# EAGLE board Sensor_Board_0x04_Luminosity_TSL2561_v1 (EAGLE 8.4.1)
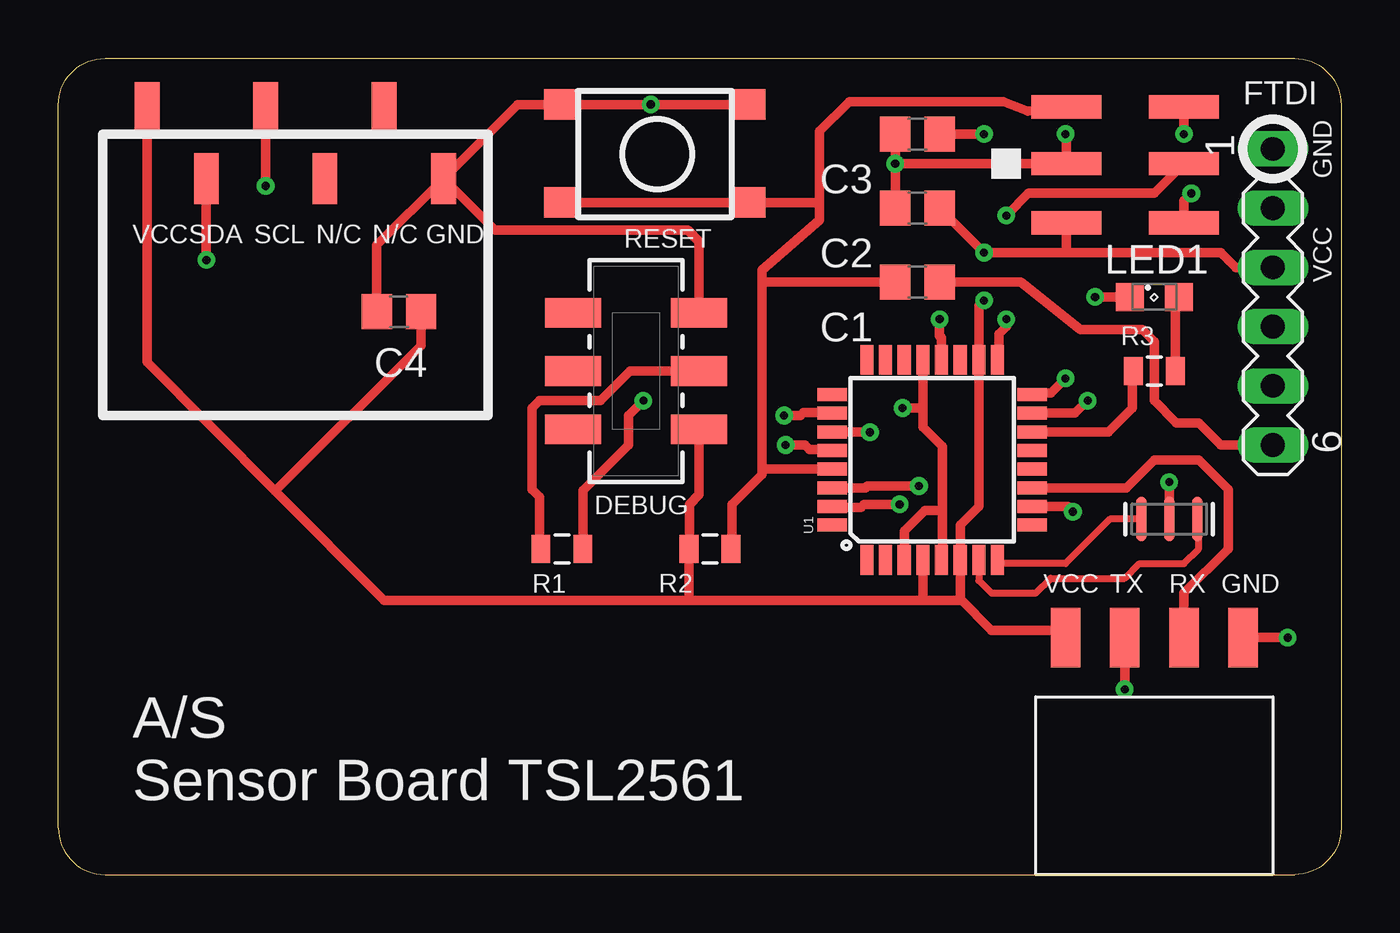
[diagram p0: board, top side]
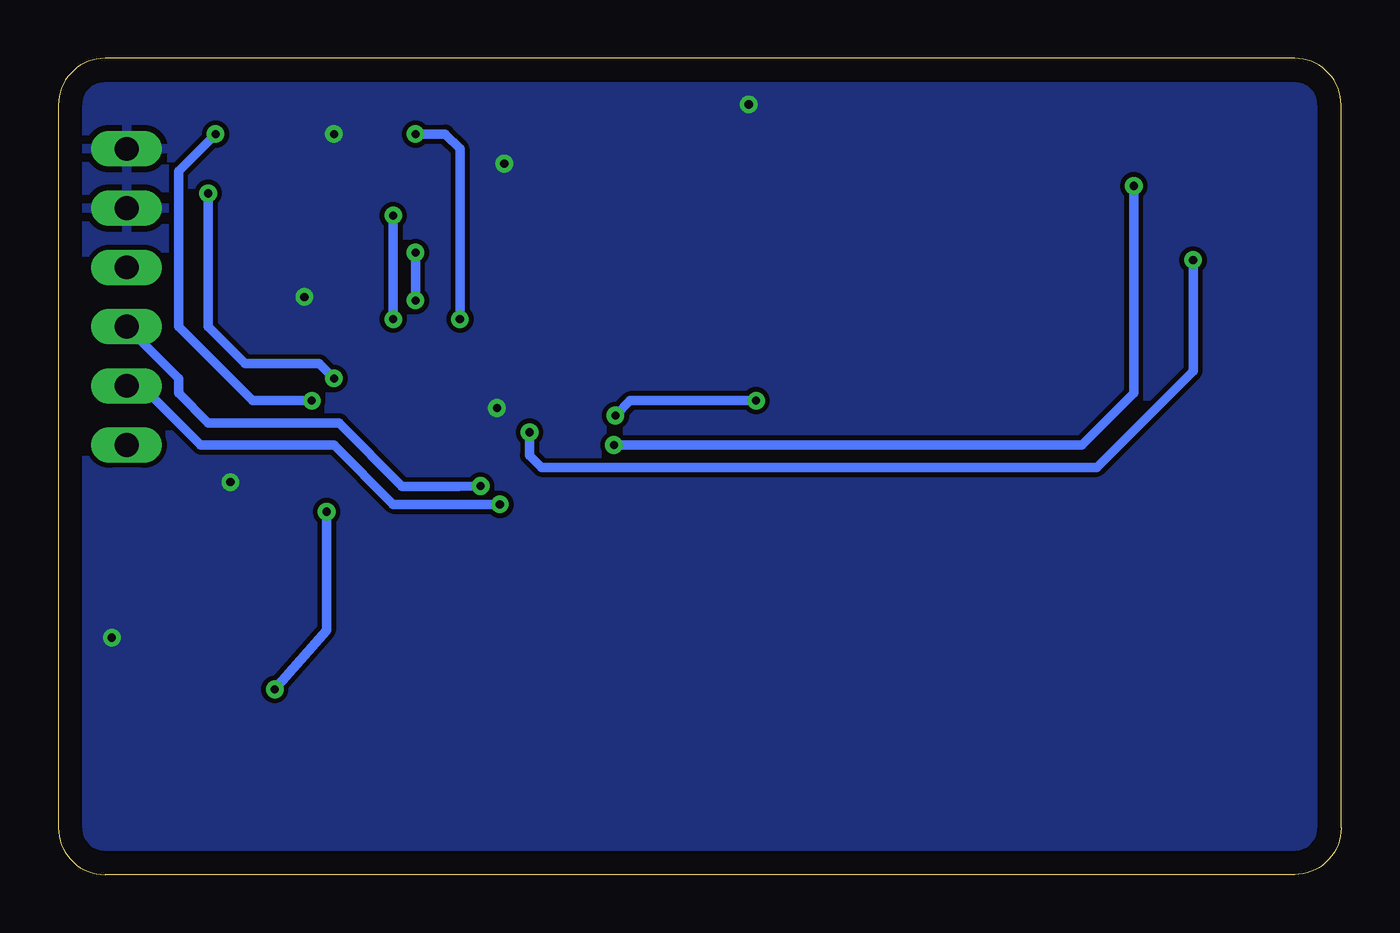
[diagram p1: board, bottom side, seen from below]

Size 55 x 35 mm. Coordinates in mm from the lower left corner, seen from the top.
Outline: 55,33 55,2 arc-90 53,0 2,0 arc-90 0,2 0,33 arc-90 2,35 53,35 arc-90 55,33
Copper layers (1*16): Top 0.035mm / dielectric 1.5mm / Bottom 0.035mm
Design rules "default *": minimum track width 14mil, minimum drill 24mil, track to track 8mil, track to pad 8mil, pad to pad 8mil, via to via 8mil, smd to smd 8mil, copper to edge 40mil, drill to drill 8mil, minimum pad ring 10mil, minimum via ring 8mil, stop-mask expansion 4mil, vias tented up to drill 0mil, thermal gap 10mil
Net classes: 0 default: width 0.3 mm; 1 Vsupply: width 0.5 mm; 5 GND: width 0.5 mm

## Footprints (pad centres in the part's own frame; a part is rotated, then mirrored left to right if it is on the bottom)
C0805 = smd 1.3 x 1.5: 1 -0.95,0; 2 0.95,0
M04_SMD_90 = smd 1.27 x 2.54: 1 0,0; 2 2.54,0; 3 5.08,0; 4 7.62,0
M-2X3 = smd 1 x 3: P$1 0,0; P$2 2.54,0; P$3 4.98,0; P$4 4.98,5.05; P$5 2.54,5.05; P$6 0,5.05
SML0805 = smd 1.2 x 1.2: A 1.05,0; C -1.05,0
0805 = smd 0.8 x 1.2: 1 -0.9,0; 2 0.9,0
M-PUSHBUTTON-SMD = smd 1.55 x 1.3: 1 0,0; 2 7.95,0; 3 0,-4.2; 4 7.95,-4.2
JS202011SCQN = smd 1.27 x 2.4: 1 -2.5,-2.7; 2 0,-2.7; 3 2.5,-2.7; 4 -2.5,2.7; 5 0,2.7; 6 2.5,2.7
M06_SMD_STRAIGHT = smd 1.067 x 2.184: P1 0,0; P2 2.54,-3.048; P3 5.08,0; P4 7.62,-3.048; P5 10.16,0; P6 12.7,-3.048
MA06-1 = drill 1.016 long: 1 -6.35,0; 2 -3.81,0; 3 -1.27,0; 4 1.27,0; 5 3.81,0; 6 6.35,0
TQFP32-08 = smd 1.27 x 0.559: 1 -4.293,2.8; 2 -4.293,2; 3 -4.293,1.2; 4 -4.293,0.4; 5 -4.293,-0.4; 6 -4.293,-1.2; 7 -4.293,-2; 8 -4.293,-2.8; 17 4.293,-2.8; 18 4.293,-2; 19 4.293,-1.2; 20 4.293,-0.4; 21 4.293,0.4; 22 4.293,1.2; 23 4.293,2; 24 4.293,2.8 | smd 0.559 x 1.27: 9 -2.8,-4.293; 10 -2,-4.293; 11 -1.2,-4.293; 12 -0.4,-4.293; 13 0.4,-4.293; 14 1.2,-4.293; 15 2,-4.293; 16 2.8,-4.293; 25 2.8,4.293; 26 2,4.293; 27 1.2,4.293; 28 0.4,4.293; 29 -0.4,4.293; 30 -1.2,4.293; 31 -2,4.293; 32 -2.8,4.293
RESONATOR-SMD = smd 0.45 x 1.905: 1 -1.2,0; 2 0,0; 3 1.2,0

## Placement (x,y rotation side)
C1  100n  [C0805]  36.83,25.4 180 top
C2  100n  [C0805]  36.83,28.57 180 top
C3  100n  [C0805]  36.83,31.75 180 top
C4  100n  [C0805]  14.61,24.13 180 top
J1  M04_SMD_90  [M04_SMD_90]  43.18,10.16 0 top
J4  ARDUINO_ISP  [M-2X3]  48.26,27.94 90 top
LED1  Red  [SML0805]  46.99,24.77 0 top
R1  10k  [0805]  21.59,13.97 0 top
R2  10k  [0805]  27.94,13.97 180 top
R3  330  [0805]  46.99,21.59 180 top
S1  Reset  [M-PUSHBUTTON-SMD]  21.59,33.02 0 top
S2  JS202011SCQN  [JS202011SCQN]  24.77,21.59 90 top
SV1  M06_SMD_STRAIGHT  [M06_SMD_STRAIGHT]  16.51,29.84 180 top
SV2  [MA06-1]  52.07,24.77 270 top
U1  ATMEGA328P_TQFP  [TQFP32-08]  37.47,17.78 90 top
Y1  8MHZ  [RESONATOR-SMD]  47.62,15.24 180 top

## Library data of the parts
C1-C4 = eagle-ltspice; SPICEMODEL: NONE; SPICEPREFIX: C
J1 S2 = myownthings
J4 S1 = marc_library
LED1 = led
R1-R3 = SparkFun-Passives
SV1 = wsn
SV2 = con-lstb; OC_FARNELL: unknown; OC_NEWARK: unknown
U1 = marc_library; PROD_ID: IC-09069
Y1 = marc_library; PROD_ID: XTAL-08895

## Nets
DBG_ENABLE: R1.2 U1.26
FTDI_RESET: C1.1 SV2.6
FTDI_RXI: SV2.4 U1.30
FTDI_TXO: SV2.5 U1.31
GND [GND]: C2.2 C3.2 C4.2 J1.4 J4.P$5 LED1.C S1.1 S1.2 S2.3 SV1.P1 SV2.1 SV2.2 U1.3 U1.5 U1.21 Y1.2
L1: R3.2 U1.14
MCU_RXI: J1.3 U1.11
MCU_TXO: J1.2 U1.10
MISO: J4.P$1 U1.16
MOSI: J4.P$3 U1.15
N$1: U1.8 Y1.3
N$2: U1.7 Y1.1
N$3: R1.1 S2.2
N$15: C3.1 U1.20
N$30: LED1.A R3.1
RESET: C1.2 J4.P$4 R2.1 S1.3 S1.4 U1.29
SCK: J4.P$2 U1.17
SCL: SV1.P4 U1.28
SDA: SV1.P5 U1.27
VCC [Vsupply]: C2.1 C4.1 J1.1 J4.P$6 R2.2 S2.1 SV1.P6 SV2.3 U1.4 U1.6 U1.18

## Tracks (layer width: path | path; a pad name or v marks a point on that pad's centre or on a via)
DBG_ENABLE  (via drill 0.35)
  Top 0.406: v25.08,20.32 24.45,19.68 24.45,18.41 22.49,16.46 R1.2 | v31.11,19.68 31.81,19.68 31.94,19.81 33.14,19.81 U1.26
  Bottom 0.406: v25.08,20.32 30.48,20.32 v31.11,19.68
FTDI_RESET
  Top 0.406: C1.1 41.27,25.4 43.81,23.37 46.48,23.37 46.99,22.86 46.99,20.32 47.94,19.37 48.9,19.37 49.85,18.41 SV2.6
FTDI_RXI  (via drill 0.35)
  Top 0.406: v36.89,16.66 34.69,16.66 34.61,16.57 U1.30
  Bottom 0.406: SV2.4 49.85,21.27 49.85,20.64 48.58,19.37 42.95,19.37 40.26,16.64 37.85,16.64 v36.89,16.66
FTDI_TXO  (via drill 0.35)
  Top 0.406: v36.07,15.88 34.54,15.88 34.42,15.75 33.2,15.75 U1.31
  Bottom 0.406: SV2.5 51.44,20.95 48.9,18.41 43.18,18.41 40.64,15.88 v36.07,15.88
GND  (via drill 0.35)
  Top 0.406: Y1.2 v47.62,16.83 | v43.18,31.75 43.21,31.72 J4.P$5 35.9,30.48 35.88,30.5 | C4.2 13.65,26.99 SV1.P1 | SV1.P1 19.68,33.02 S1.1 v25.4,33.02 S1.2 | 35.88,30.5 C3.2 | 35.88,30.5 C2.2 | S2.3 27.46,27.14 26.99,27.62 18.73,27.62 SV1.P1 | U1.21 37.06,20 | 37.06,20 37.06,19.2 37.91,18.35 37.91,15.63 | 37.91,15.63 37.91,13.53 U1.5 | U1.3 36.27,14.74 37.15,15.62 37.9,15.62 37.91,15.63 | 37.06,20 v36.2,20 | J1.4 v52.7,10.16 | LED1.C v44.45,24.77
  other vias: 35.88,30.48
  pour Bottom: 55,33 55,2 arc-90 53,0 2,0 arc-90 0,2 0,33 arc-90 2,35 53,35 arc-90
L1
  Top 0.406: U1.14 45.02,18.98 46.04,20 46.04,21.54 R3.2
MCU_RXI
  Top 0.406: U1.11 45.79,16.58 46.99,17.78 48.9,17.78 50.16,16.51 50.16,13.97 48.26,12.06 J1.3
MCU_TXO  (via drill 0.35)
  Top 0.406: U1.10 43.27,15.78 v43.5,15.56 | v45.72,7.94 J1.2
  Bottom 0.406: v43.5,15.56 43.5,10.48 v45.72,7.94
MISO  (via drill 0.35)
  Top 0.406: J4.P$1 48.26,28.89 v48.58,29.21 | v43.18,21.27 42.55,20.64 41.81,20.64 U1.16
  Bottom 0.406: v48.58,29.21 48.58,23.5 46.99,21.91 43.81,21.91 v43.18,21.27
MOSI  (via drill 0.35)
  Top 0.406: U1.15 43.59,19.78 v44.13,20.32 | v48.26,31.75 J4.P$3
  Bottom 0.406: v44.13,20.32 46.67,20.32 49.85,23.5 49.85,30.16 v48.26,31.75
N$1
  Top 0.305: Y1.3 45.09,15.24 43.18,13.34 40.42,13.34 U1.8
N$2
  Top 0.305: U1.7 39.47,12.61 40.01,12.06 41.91,12.06 42.55,12.7 45.72,12.7 46.35,13.34 48.26,13.34 48.9,13.97 48.9,15.17 Y1.1
N$3
  Top 0.406: S2.2 24.51,21.59 23.24,20.32 20.64,20.32 20.32,20 20.32,16.51 20.64,16.19 20.64,14.02 R1.1
N$15  (via drill 0.35)
  Top 0.406: C3.1 v39.69,31.75 | v37.78,23.81 37.78,23.09 37.85,23.02 37.85,22.09 U1.20
  Bottom 0.406: v39.69,31.75 38.42,31.75 37.78,31.11 v37.78,23.81
N$30
  Top 0.406: R3.1 47.89,24.61 LED1.A
RESET
  Top 0.305: 32.57,28.82 32.64,28.75
  Top 0.406: J4.P$4 41.57,32.73 40.51,33.15 33.91,33.15 32.64,31.88 32.64,28.75 32.64,28.07 30.16,25.91 30.16,25.4 | 30.16,25.4 30.16,17.43 | C1.2 30.16,25.4 | S1.3 S1.4 32.57,28.82 | 30.16,17.43 30.22,17.38 U1.29 | 30.16,17.43 30.16,17.14 28.89,15.88 28.89,14.02 R2.1
SCK  (via drill 0.35)
  Top 0.406: J4.P$2 46.99,29.21 41.59,29.21 v40.64,28.26 | v40.64,23.81 40.64,23.5 40.32,23.18 40.32,22.13 U1.17
  Bottom 0.406: v40.64,28.26 v40.64,23.81
SCL  (via drill 0.35)
  Top 0.406: v8.89,29.53 SV1.P4 | 33.09,18.1 U1.28 33.13,18.22 32.19,18.22 32,18.41 v31.18,18.41
  Bottom 0.406: v8.89,29.53 8.89,20.64 11.11,18.41 v31.18,18.41
SDA  (via drill 0.35)
  Top 0.406: U1.27 34.78,18.98 v34.8,18.96 | v6.35,26.35 SV1.P5
  Bottom 0.406: v34.8,18.96 34.8,17.97 34.29,17.46 10.48,17.46 6.35,21.59 v6.35,26.35
VCC  (via drill 0.35)
  Top 0.406: S2.1 27.46,16.29 27.05,15.88 R2.2 27.04,11.79 27.08,11.75 | SV1.P6 3.81,21.97 9.3,16.44 | 9.3,16.44 13.97,11.75 27.08,11.75 | C4.1 15.55,22.69 9.3,16.44 | 38.66,11.82 U1.6 38.67,14.99 39.47,15.78 U1.18 39.47,24.39 v39.69,24.61 | 38.66,11.82 38.66,11.75 37.15,11.75 | 38.66,11.82 40.01,10.48 42.86,10.48 J1.1 | 43.21,26.67 v39.69,26.67 C2.1 | 43.21,26.67 J4.P$6 | 43.21,26.67 49.85,26.67 50.48,26.04 SV2.3 | 37.15,11.75 27.08,11.75 | 37.15,11.75 37.06,11.83 U1.4
  Bottom 0.406: v39.69,24.61 v39.69,26.67

## Text on the board
tPlace: FTDI | GND | VCC | SDA | SCL | N/C | N/C | GND | RESET | VCC | DEBUG | VCC | TX | RX | GND | A/S / Sensor Board TSL2561